# Altium PCB pcb.PcbDoc
Units mm, origin at the board's own origin, x right, y up, seen from the top; angles counter-clockwise.
Board outline 94.24 x 98.55 mm, 2 copper layers (Top Layer, Bottom Layer); 25 components, 45 nets, 174 pads, 88 vias.
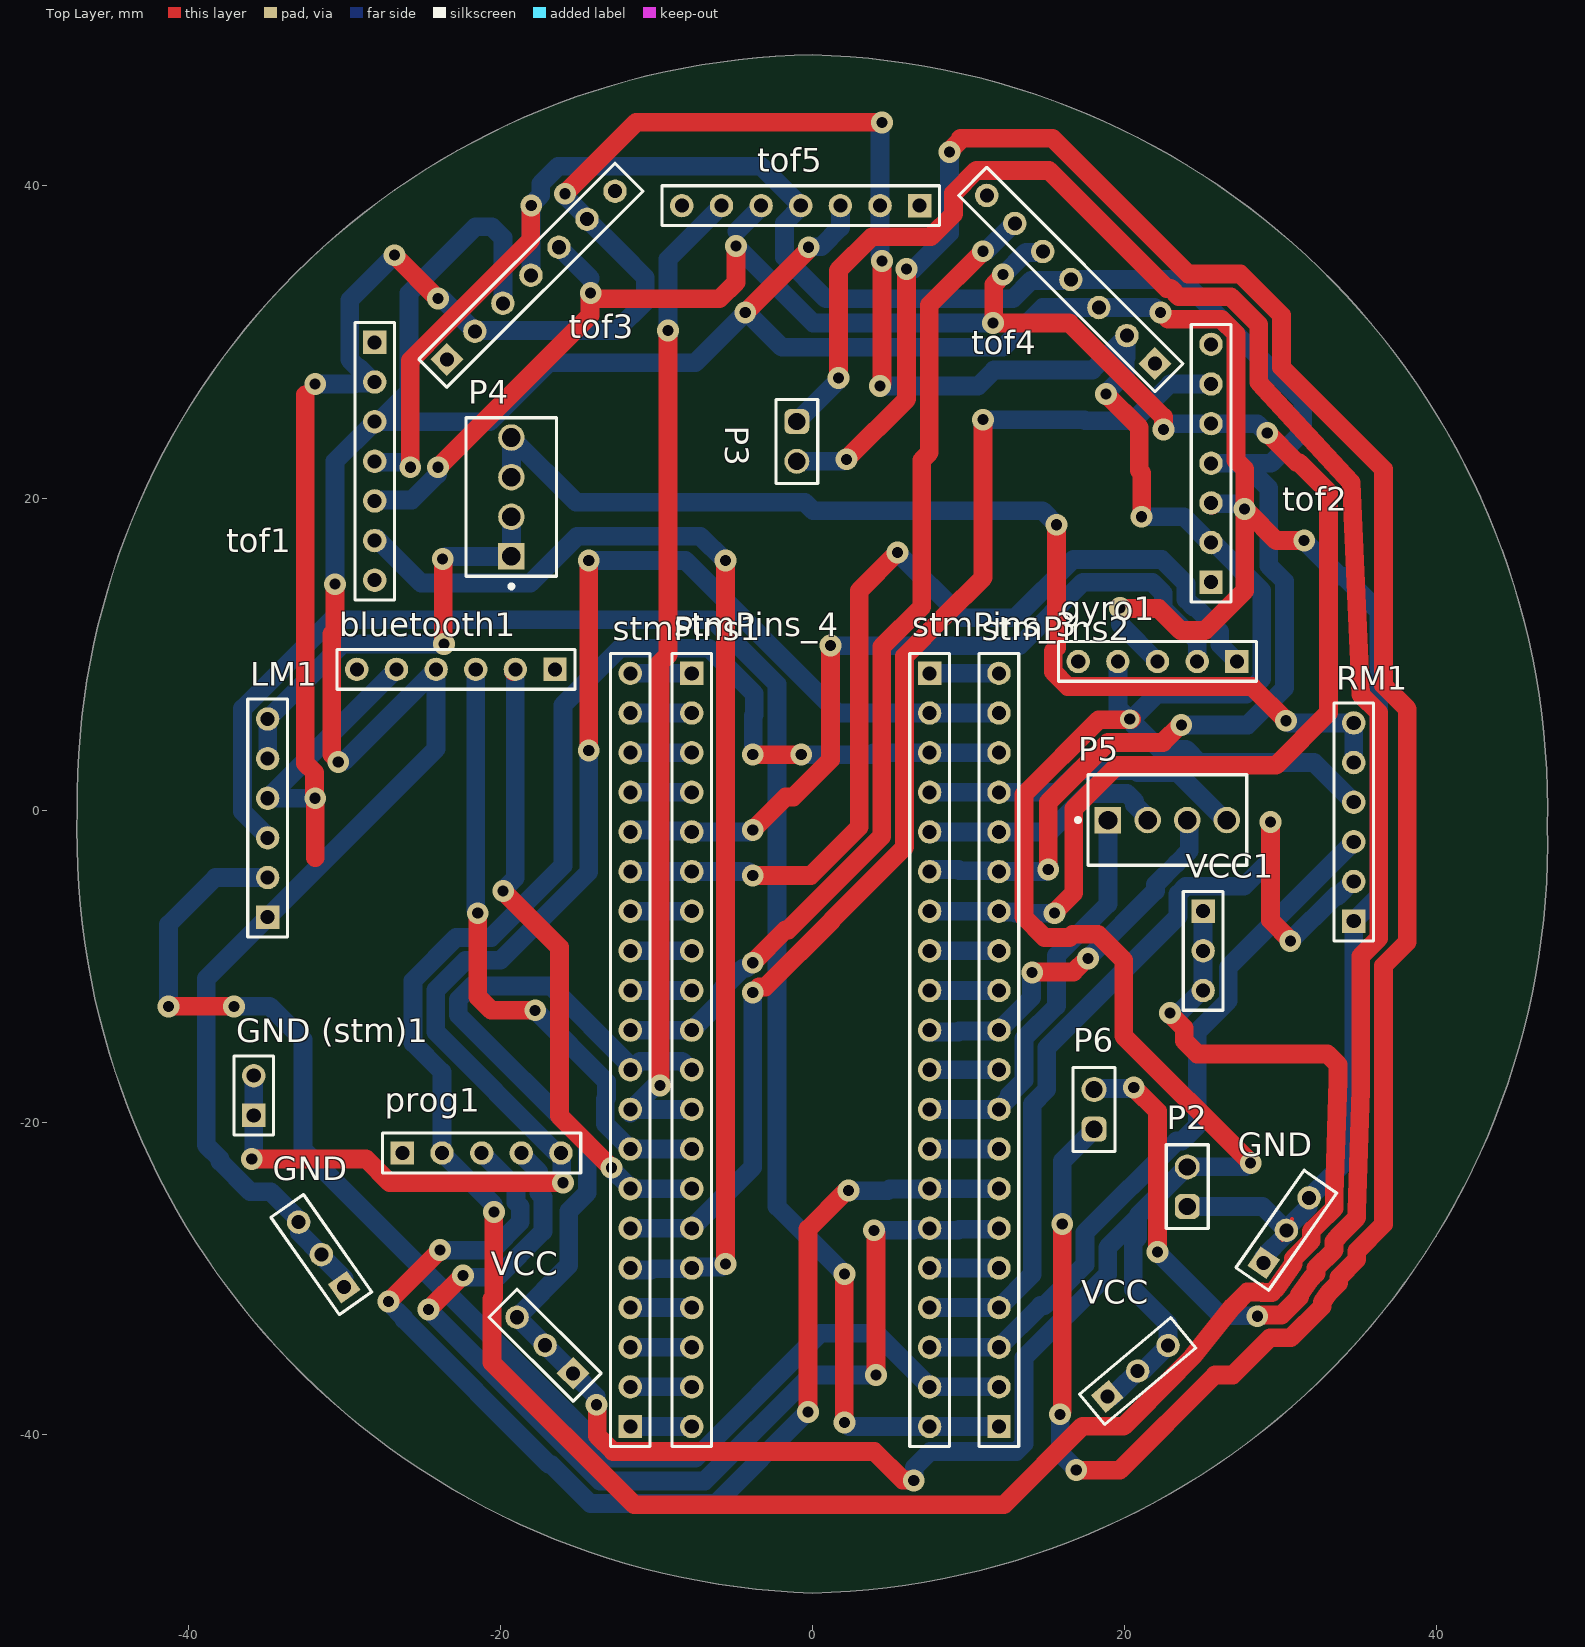
[diagram p0: Top Layer view]
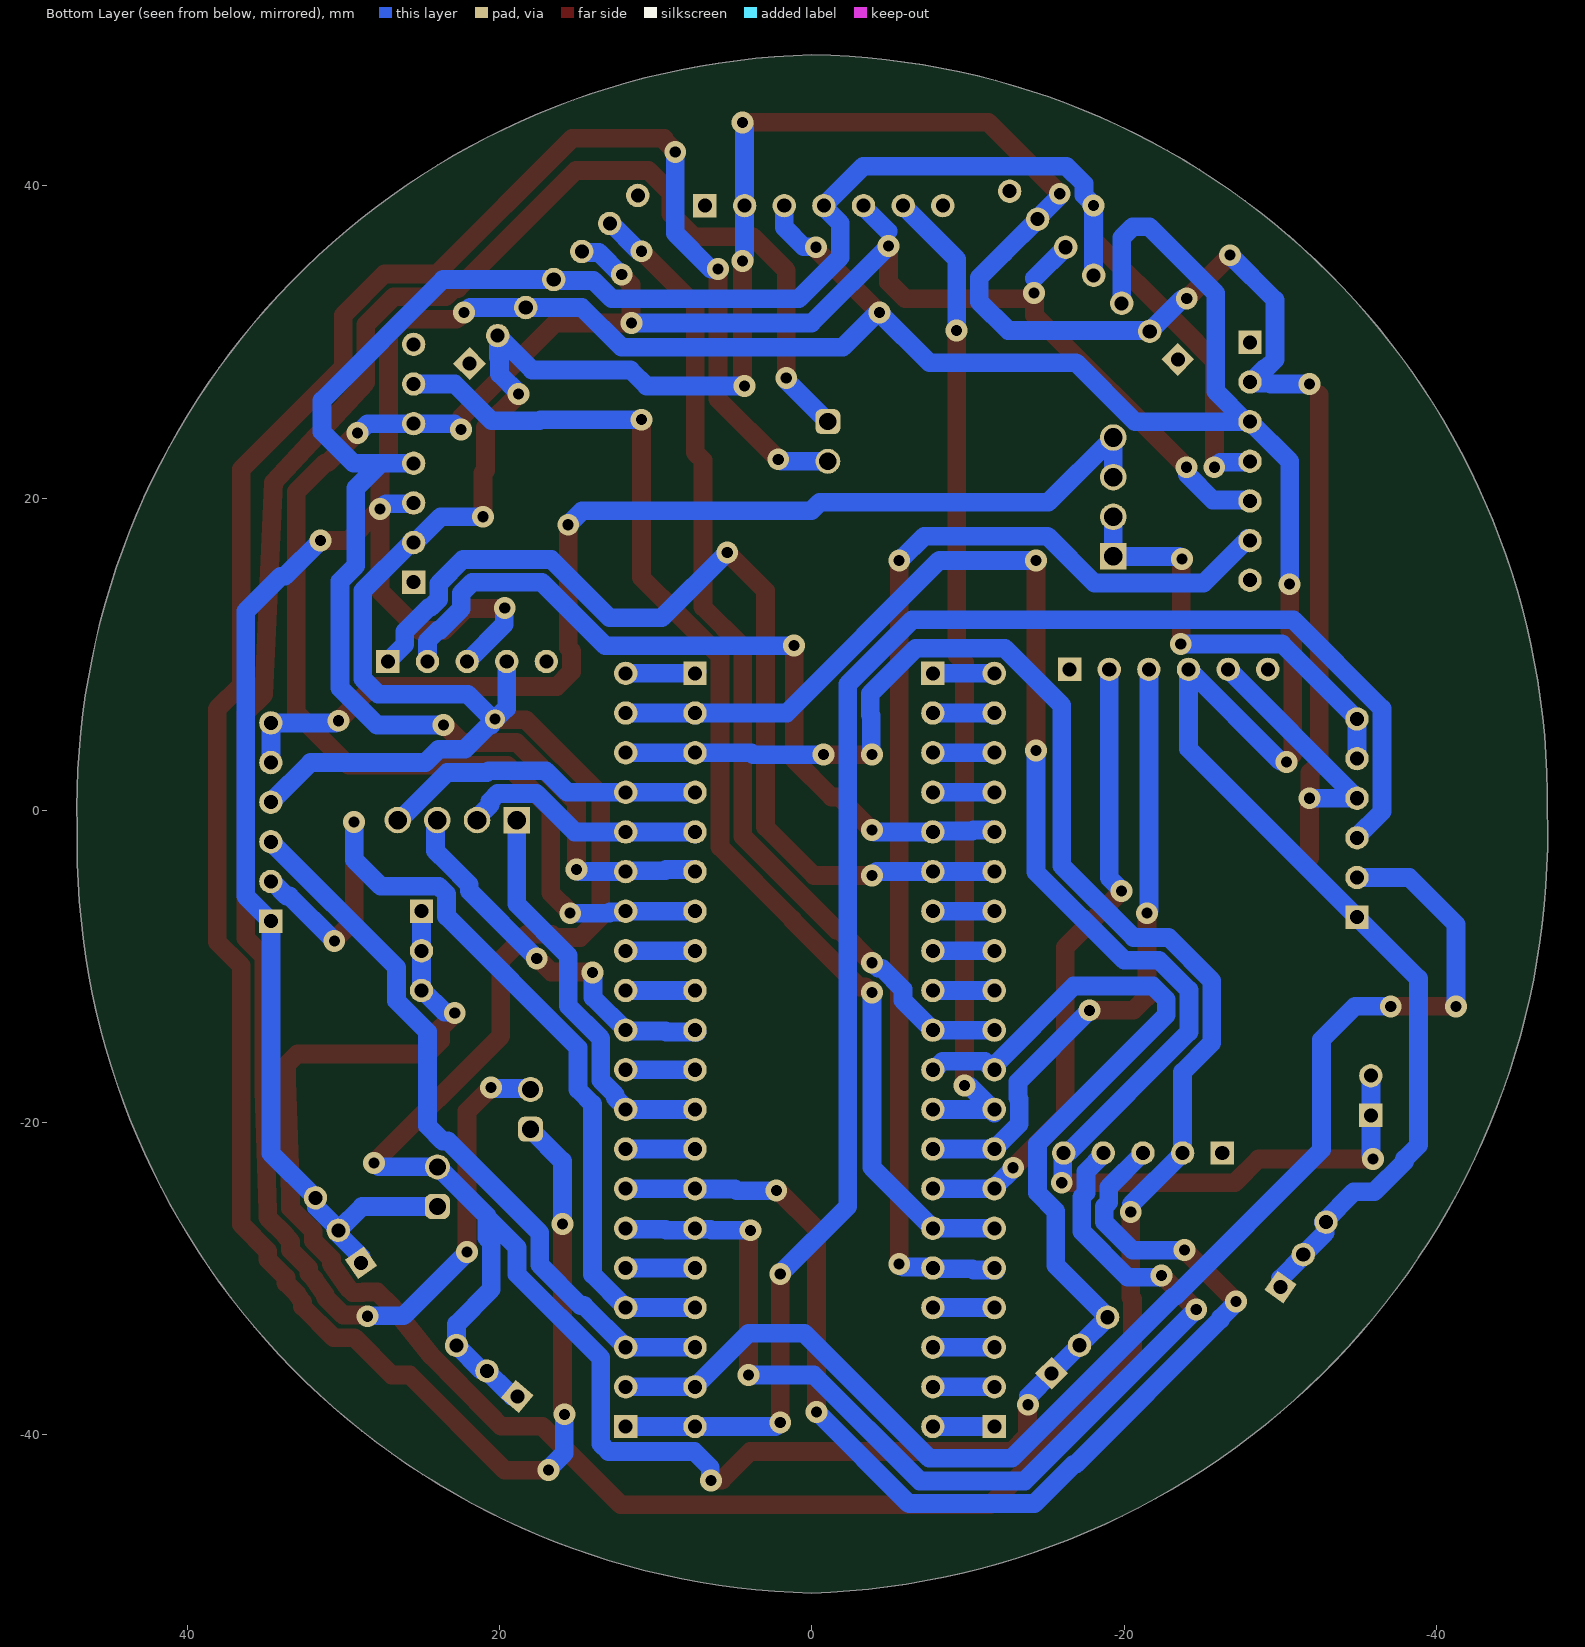
[diagram p1: Bottom Layer view, seen from below]

## Layer stack, top to bottom
Top Solder: solder mask 0.0102, Solder Resist, Dk 3.5
Top Layer: signal copper 0.0356
Dielectric 1: dielectric 0.32, FR-4, Dk 4.8
Bottom Layer: signal copper 0.0356
Bottom Solder: solder mask 0.0102, Solder Resist, Dk 3.5

## Board outline
-47.117,0 ccw(c1.524,-1.524) 0,-50.165 ccw(c-1.026,-2.058) 47.082,-1.032 ccw(c-1.168,0.137) 0,48.387 ccw(c0.635,0.635)

## Design rules (kind name [scope] priority, off if disabled: settings)
Clearance [All] p1: gap=0.254 ignorepadtopadclearanceinfootprint=FALSE except(0: Arc-Hole Track-Hole SMDPad-Hole THPad-Hole Via-Hole Fill-Hole Poly-Hole Region-Hole Text-Hole)
PolygonConnect [All] p1: connectstyle=Relief reliefconductorwidth=0.254 reliefentries=4 polygonreliefangle="90 Angle" airgapwidth=0.254
RoutingVias [All] p1: holewidth=0.711 width=1.4 viastyle="Through Hole" minholewidth=0.711 minwidth=1.4 maxholewidth=0.711 maxwidth=1.4
SolderMaskExpansion [All] p1: expansion=0.102 istentingtop=FALSE
Width [All] p1: maxlimit=1.2 minlimit=0.2 preferedwidth=1.2 minimp=50.000000 maximp=50.000000 favimp=50.000000
30 further rules are at their usual default settings.

## Classes and differential pairs
component class Sheet1: bluetooth1 GND "GND (stm)1" gyro1 prog1 RM1 stm1 stmPins1 stmPins2 stmPins_3 stmPins_4 tof1 tof2 tof3 tof4 tof5 VCC1

## Components (designator, comment, footprint, x,y, rotation, side; value= is the part's Value field where it differs from the comment)
bluetooth1 "Header 6" HDR1X6 -16.51,9.017 r180 top
GND "Header 3" HDR1X3 28.896,-29.005 r55 top
GND "Header 3" HDR1X3 -30.023,-30.562 r125 top
"GND (stm)1" "Header 2" HDR1X2 -35.814,-19.558 r90 top
gyro1 "Header 5" HDR1X5 27.178,9.525 r180 top
LM1 "Header 6" HDR1X6 -34.925,-6.858 r90 top
P2 "61300211121" 61300211121 24.003,-24.13 r90 top
P3 "61300211121" 61300211121 -1.016,23.622 r270 top
P4 "22-27-2041" MOLX-22-27-2041_V -19.304,20.066 r270 top
P5 "22-27-2041" MOLX-22-27-2041_V 22.733,-0.635 r180 top
P6 "61300211121" 61300211121 18.034,-19.177 r90 top
prog1 "Header 5" HDR1X5 -26.289,-21.971 r0 top
RM1 "Header 6" HDR1X6 34.671,-7.112 r90 top
stmPins1 "Header 20" HDR1X20 -11.684,-39.497 r90 top
stmPins2 "Header 20" HDR1X20 11.938,-39.497 r90 top
stmPins_3 "Header 20" HDR1X20 7.493,8.763 r270 top
stmPins_4 "Header 20" HDR1X20 -7.747,8.763 r270 top
tof1 "Header 7" HDR1X7 -28.067,29.972 r270 top
tof2 "Header 7" HDR1X7 25.527,14.605 r90 top
tof3 "Header 7" HDR1X7 -23.44,28.884 r45 top
tof4 "Header 7" HDR1X7 21.934,28.612 r135 top
tof5 "Header 7" HDR1X7 6.858,38.735 r180 top
VCC "Header 3" HDR1X3 -15.349,-36.086 r135 top
VCC "Header 3" HDR1X3 18.882,-37.574 r40 top
VCC1 "Header 3" HDR1X3 25.019,-6.477 r270 top

## Footprints (in the part's own frame and the unit in brackets; to place one, negate y for a bottom-side part, rotate by r counter-clockwise, add the part's x,y. Pads: shape width x height; smd on the part's side, far side on the other; paste and mask are expansions set on the pad)
61300211121 [mm] "Pin Header, pitch 2.54 mm, THT, Vertical, single row, 2p"
  rrect50% 1.6x1.6 hole 1.1: 1(-1.27,0)
  round 1.6 hole 1.1: 2(1.27,0)
  silkscreen extent -2.69,-1.34 2.69,1.34, body extent -2.54,-1.27 2.54,1.27, height 8.57
HDR1X2 [mm] "Connector; Header; 2 Position"
  rect 1.5x1.5 hole 0.9: 1(0,0)
  round 1.5 hole 0.9: 2(2.54,0)
  silkscreen extent -1.27,-1.27 3.81,1.27
HDR1X3 [mm] "Connector; Header; 3 Position"
  rect 1.5x1.5 hole 0.9: 1(0,0)
  round 1.5 hole 0.9: 2(2.54,0) 3(5.08,0)
  silkscreen extent -1.27,-1.27 6.35,1.27
HDR1X5 [mm] "Connector; Header; 5 Position"
  rect 1.5x1.5 hole 0.9: 1(0,0)
  round 1.5 hole 0.9: 2(2.54,0) 3(5.08,0) 4(7.62,0) 5(10.16,0)
  silkscreen extent -1.27,-1.27 11.43,1.27
HDR1X6 [mm] "Connector; Header; 6 Position"
  rect 1.5x1.5 hole 0.9: 1(0,0)
  round 1.5 hole 0.9: 2(2.54,0) 3(5.08,0) 4(7.62,0) 5(10.16,0) 6(12.7,0)
  silkscreen extent -1.27,-1.27 13.97,1.27
HDR1X7 [mm] "Connector; Header; 7 Position"
  rect 1.5x1.5 hole 0.9: 1(0,0)
  round 1.5 hole 0.9: 2(2.54,0) 3(5.08,0) 4(7.62,0) 5(10.16,0) 6(12.7,0) 7(15.24,0)
  silkscreen extent -1.27,-1.27 16.51,1.27
HDR1X20 [mm] "Connector; Header; 20 Position"
  rect 1.5x1.5 hole 0.9: 1(0,0)
  round 1.5 hole 0.9: 2(2.54,0) 3(5.08,0) 4(7.62,0) 5(10.16,0) 6(12.7,0) 7(15.24,0) 8(17.78,0) 9(20.32,0) 10(22.86,0) 11(25.4,0) 12(27.94,0) 13(30.48,0) 14(33.02,0) 15(35.56,0) 16(38.1,0) 17(40.64,0) 18(43.18,0) 19(45.72,0) 20(48.26,0)
  silkscreen extent -1.27,-1.27 49.53,1.27
MOLX-22-27-2041_V [mm] "CONN, 4-Leads, Body 10.16x5.8mm, Pitch 2.54mm"
  rect 1.7x1.7 hole 1.19: 1(3.81,0)
  round 1.7 hole 1.19: 2(1.27,0) 3(-1.27,0) 4(-3.81,0)
  silkscreen extent -5.08,-2.9 5.85,2.9, body extent -5.08,-2.9 5.08,2.9, height 11.7

## Part data
bluetooth1 LM1 RM1: "Header, 6-Pin", LatestRevisionDate=17-Jul-2002, LatestRevisionNote="Re-released for DXP Platform.", Publisher="Altium Limited"
GND GND VCC VCC VCC1: "Header, 3-Pin", LatestRevisionDate=17-Jul-2002, LatestRevisionNote="Re-released for DXP Platform.", Publisher="Altium Limited"
"GND (stm)1": "Header, 2-Pin", LatestRevisionDate=17-Jul-2002, LatestRevisionNote="Re-released for DXP Platform.", Publisher="Altium Limited"
gyro1 prog1: "Header, 5-Pin", LatestRevisionDate=17-Jul-2002, LatestRevisionNote="Re-released for DXP Platform.", Publisher="Altium Limited"
P2 P3 P6: library part CMP-1712-00002-5, Color=Black, Contact Resistance=20mΩ, Current Rating=3A, Max Operating Temperature=125°C, Min Operating Temperature=-40°C, Operating Supply Voltage=250V, Connector Type="Male Pin", Contact Gender=Male, Contact Material=Copper, Contact Mating Length=5.9944mm, Contact Plating=Gold, Gender=Male, Height=8.94mm, Housing Material=PBT, Lead Free="Lead Free", Lead Pitch=2.54mm, Mount="Through Hole", NexarPartId=20081794, Number of Contacts=2, Number of Pins=2, Number of Positions=2, Number of Rows=1, Orientation=Vertical, Packaging=Bulk, Pitch=2.54mm, REACH SVHC="No SVHC", RoHS=Compliant, Termination="Through Hole", Voltage Rating=250V
P4 P5: library part CMP-2000-05243-1, "Male Header, Pitch 2.54 mm, 1 x 4 Position, Height 11.7 mm, Tail Length 3.56 mm, RoHS, Bulk", Current Rating=4A, Manufacturer=Molex, Operating temperature=0degCto+75degC, Voltage Rating=250V, Contact Material=Tinplatedbrass, Datasheet URL=http://www.molex.com/pdm_docs/sd/022272041_sd.pdf, Datasheet Version="Rev. F, 06/2009", Housing Material=Nylon(UL94V-0), Manufacturer URL=http://www.molex.com/
stmPins1 stmPins2 stmPins_3 stmPins_4: "Header, 20-Pin", LatestRevisionDate=17-Jul-2002, LatestRevisionNote="Re-released for DXP Platform.", Publisher="Altium Limited"
tof1 tof2 tof3 tof4 tof5: "Header, 7-Pin", LatestRevisionDate=17-Jul-2002, LatestRevisionNote="Re-released for DXP Platform.", Publisher="Altium Limited"

## Via types
v1: diameter 1.4, hole 0.711, Top Layer to Bottom Layer, 87 vias
v2: diameter 1.27, hole 0.711, Top Layer to Bottom Layer, 1 vias

## Nets (pads, with @x,y where several pads share a name; then routed paths per layer and width w, separated by ;. In a path a pad name is that pad's centre, name@x,y a point inside that pad or via, vN(x,y) a via of type N, cw(c..) or ccw(c..) an arc to the next point about the centre after c; other vN are vias at no path point)
5V: bluetooth1.5 gyro1.4 LM1.4 P2.2 RM1.4 stmPins1.10 stmPins_4.11 tof1.2 tof2.2 tof3.2 tof3.6 tof4.2 tof5.2 VCC.1 VCC.2 VCC.3 | length 367.9
  Top Layer w0.254: stmPins1.10@-11.811,-16.51 stmPins1.10 ; VCC.1@18.882,-37.574 VCC.1@19.195,-37.574 ; VCC.2@20.828,-35.941 VCC.2@20.985,-35.941 ; VCC.3@22.617,-34.308 VCC.3@22.774,-34.308 ; P2.2@23.749,-22.606 P2.2
  Top Layer w1.2: -32.512,26.616 -32.512,3.009 -31.915,2.413 -31.915,0.854 -31.877,0.816 -31.877,-3.048 ; v1(-26.797,35.56) v1(-24.014,32.777) ; v1(-15.875,39.497) -11.303,44.069 v1(4.445,44.069) ; v1(-13.843,-38.1) -13.805,-38.138 -13.805,-40.084 -12.788,-41.101 3.948,-41.101 5.765,-42.918 6.439,-42.918 v1(6.477,-42.956) ; v1(4.318,27.178) 4.318,27.232 4.445,27.359 v1(4.445,35.179) ; v1(18.796,26.67) 18.796,26.651 20.925,24.522 20.925,21.765 21.082,21.608 v1(21.082,18.796) ; v2(20.32,5.827) 20.432,5.827 20.397,5.792 18.329,5.792 13.542,1.004 13.542,-6.85 14.85,-8.158 16.461,-8.158 16.667,-7.952 18.277,-7.952 19.939,-9.613 19.939,-14.478 v1(28.067,-22.606)
  Bottom Layer w1.2: v1(-31.877,0.762) LM1.4 -34.925,0.889 -34.896,0.86 -34.827,0.86 bluetooth1.5 ; v1(-31.877,27.305) -29.377,27.305 -29.307,27.375 tof1.2@-28.124,27.375 ; tof1.2 tof1.2@-28.124,27.375 ; v1(-26.797,35.56) -29.671,32.686 -29.671,28.868 -29.141,28.338 -29.054,28.338 -28.124,27.408 tof1.2@-28.124,27.375 ; v1(-24.014,32.777) -23.975,32.738 -23.703,32.738 tof3.2 -21.587,30.737 -12.572,30.737 -10.725,32.584 -10.725,34.129 -12.301,35.705 tof3.6 -14.46,37.945 -15.837,39.322 -15.837,39.459 v1(-15.875,39.497) ; v1(-13.843,-38.1) -13.881,-38.062 -13.881,-37.554 -15.349,-36.086 -17.145,-34.29 -18.941,-32.494 -15.621,-29.174 -15.621,-25.693 -14.448,-24.52 -14.448,-21.384 -22.705,-13.127 -22.705,-12.133 -21.845,-11.273 -16.776,-11.273 -11.741,-16.308 -11.741,-16.58 stmPins1.10 -11.603,-16.637 -11.065,-16.099 -8.366,-16.099 -7.828,-16.637 stmPins_4.11 ; v1(4.318,27.178) 10.6,27.178 11.626,28.204 17.934,28.204 tof4.2@20.081,30.35 ; v1(4.445,35.179) 4.445,35.233 4.318,35.36 tof5.2 4.318,43.888 4.445,44.015 v1(4.445,44.069) ; v1(6.477,-42.956) 6.515,-42.918 6.515,-42.126 7.54,-41.101 13.042,-41.101 13.542,-40.601 13.542,-35.099 18.9,-29.741 18.9,-28.021 20.828,-26.093 ; v1(18.796,26.67) 18.796,26.724 20.02,27.948 20.02,28.965 20.081,29.027 tof4.2@20.081,30.35 ; VCC.1@18.882,-37.574 19.183,-37.574 19.483,-37.273 19.496,-37.273 20.828,-35.941 20.885,-35.884 21.198,-35.884 22.774,-34.308 22.774,-32.934 20.544,-30.704 20.544,-27.677 20.828,-27.393 20.828,-26.002 23.97,-22.86 P2.2 27.759,-22.86 28.013,-22.606 v1(28.067,-22.606) ; gyro1.4 19.558,6.496 19.632,6.496 20.301,5.827 v2(20.32,5.827) v2@20.385,5.761 ; tof4.2 tof4.2@20.081,30.35 ; v2@20.574,5.461 v2@20.574,5.573 ; v1(21.082,18.796) 23.795,18.796 25.446,17.145 tof2.2 25.584,17.088 25.752,17.088 28.782,14.058 28.782,8.421 27.786,7.425 22.049,7.425 v2@20.385,5.761 ; RM1.4 32.131,3.048 24.786,3.048 23.927,3.907 22.24,3.907 v2@20.574,5.573 ; v2@20.385,5.761 v2@20.574,5.573
6V: P3.2 P6.1 | length 164.7
  Top Layer w1.2: v1(2.159,22.479) 6.019,26.339 v1(6.019,34.671) ; v1(8.763,42.164) 8.763,42.218 9.466,42.921 9.466,43.053 15.367,43.053 24.063,34.357 27.396,34.357 30.039,31.714 30.039,28.381 36.576,21.844 36.576,8.008 38.1,6.484 38.1,-8.447 36.576,-9.971 36.576,-26.543 34.865,-28.254 34.865,-28.793 33.703,-29.955 33.703,-30.294 33.031,-30.966 32.645,-31.517 32.645,-31.805 30.639,-33.811 29.308,-33.811 26.924,-36.195 25.781,-36.195 19.685,-42.291 v1(16.891,-42.291) ; v1(15.856,-38.716) 15.856,-38.662 15.992,-38.525 15.992,-26.553 16.002,-26.543 15.992,-26.533 v1(15.992,-26.53)
  Bottom Layer w1.2: P3.2 1.978,22.352 2.105,22.479 v1(2.159,22.479) ; v1(6.019,34.671) 6.477,34.671 8.763,36.957 v1(8.763,42.164) ; v1(15.856,-38.716) 15.87,-38.73 15.87,-41.216 16.891,-42.237 v1(16.891,-42.291) ; v1(15.992,-26.53) 15.992,-22.489 P6.1
GND: bluetooth1.4 GND.1 GND.2 GND.3 gyro1.3 LM1.1 P2.1 RM1.1 tof1.3 tof2.3 tof3.3 tof4.3 tof5.3 | length 272.6
  Top Layer w0.254: GND.1@28.896,-29.005 GND.1@28.896,-28.762 ; GND.2@30.115,-27.543 30.115,-27.162 30.353,-26.924 30.353,-26.587 30.708,-26.232 30.708,-26.188 ; GND.3@31.81,-25.086 GND.3@31.81,-24.843
  Top Layer w1.2: LM1.1@-34.925,-6.985 LM1.1 ; v1(-30.607,14.478) -30.607,11.492 -30.814,11.285 -30.814,3.563 -30.397,3.146 v1(-30.397,3.092) ; tof1.3@-28.067,24.765 tof1.3 ; v1(-4.318,31.877) -0.292,35.903 -0.292,36.03 v1(-0.254,36.068) ; v1(19.685,12.954) 19.723,12.916 22.177,12.916 23.588,11.505 25.135,11.505 27.686,14.056 27.686,19.177 27.679,19.184 v1(27.679,19.304) ; v1(22.29,31.876) 22.344,31.876 22.771,31.449 26.191,31.449 27.131,30.509 27.131,22.404 27.679,21.856 27.679,19.358 v1@27.706,19.331 ; tof2.3 25.527,19.558 tof2.3@25.573,19.558 ; v1@27.94,19.05 29.718,17.272 v1(31.496,17.272)
  Bottom Layer w1.2: v1(-30.607,14.478) -30.607,22.352 -28.13,24.828 -28.003,24.828 tof1.3 tof1.3@-27.813,24.892 ; v1(-30.397,3.092) -30.359,3.13 -30.017,3.13 bluetooth1.4 -24.13,3.937 LM1.1 -38.862,-10.795 -38.862,-21.463 -37.973,-22.352 -37.973,-22.518 -36.031,-24.459 -34.723,-24.459 -32.781,-26.401 -32.937,-26.401 -32.88,-26.458 -32.88,-27.082 -31.48,-28.482 -31.48,-28.563 -30.023,-30.02 GND.1@-30.023,-30.562 ; tof3.3 -19.848,36.68 -20.551,37.383 -21.605,37.383 -25.867,33.121 -25.867,26.838 tof1.3@-27.813,24.892 ; v1(-0.254,36.068) -0.216,36.106 0.546,36.106 1.778,37.338 tof5.3 ; v1(19.685,12.954) 19.723,12.916 19.723,11.9 gyro1.3 ; v1(22.29,31.876) 22.236,31.876 21.908,32.204 14.747,32.204 12.201,29.658 -1.972,29.658 -4.191,31.877 v1(-4.318,31.877) -7.528,28.667 -16.923,28.667 -20.698,24.892 tof1.3@-27.813,24.892 ; P2.1 28.829,-25.4 GND.2@30.353,-26.924 ; tof2.3@25.584,19.742 tof2.3 25.584,19.628 27.302,19.628 27.625,19.304 v1(27.679,19.304) ; GND.1@28.896,-29.005 28.896,-28.624 30.296,-27.225 30.296,-26.981 GND.2@30.353,-26.924 ; v1(31.496,17.272) 33.778,14.99 34.032,14.99 36.275,12.747 36.275,-5.508 RM1.1 34.671,-21.982 31.81,-24.843 31.752,-24.901 31.752,-25.443 30.353,-26.843 GND.2@30.353,-26.924
lm_in_01: P5.1 stmPins2.9 stmPins_3.12 | length 26.1
  Bottom Layer w1.2: stmPins_3.12 7.493,-19.304 7.62,-19.177 stmPins2.9 11.938,-19.096 12.61,-18.424 12.61,-18.234 13.542,-17.301 13.542,-14.628 15.621,-12.549 15.621,-9.321 18.923,-6.019 P5.1
lm_motor_out: LM1.5 LM1.6 P4.1 P4.2 | length 28.3
  Top Layer w1.2: v1(-23.708,16.102) -23.67,16.065 -23.67,10.684 v1(-23.633,10.647)
  Bottom Layer w1.2: LM1.5 LM1.6 -30.12,10.647 v1(-23.633,10.647) ; v1(-23.708,16.102) -23.653,16.102 -23.499,16.256 P4.1 P4.2
lm_pwm: P5.2 stmPins2.16 stmPins_3.5 | length 16.1
  Bottom Layer w1.2: stmPins_3.5 7.493,-1.524 7.62,-1.397 stmPins2.16 15.2,-1.397 17.666,1.069 20.127,1.069 20.627,0.569 20.627,0.336 21.463,-0.5 P5.2
Netbluetooth1_2: bluetooth1.2 stmPins1.7 stmPins_4.14 | length 41.1
  Top Layer w1.2: v1(-19.831,-5.188) -16.226,-8.793 -16.226,-19.585 v1(-12.894,-22.917) ; bluetooth1.2@-19.177,8.89 bluetooth1.2
  Bottom Layer w1.2: v1(-19.831,-5.188) -19.831,-5.134 -19.05,-4.352 bluetooth1.2 ; v1(-12.894,-22.917) -12.894,-22.971 -11.684,-24.181 stmPins1.7 stmPins_4.14
Netbluetooth1_3: bluetooth1.3 stmPins1.8 stmPins_4.13 | length 40.6
  Top Layer w1.2: v1(-21.463,-6.604) -21.463,-11.968 -20.604,-12.827 v1(-17.78,-12.827) ; stmPins1.8 stmPins1.8@-11.684,-21.636
  Bottom Layer w1.2: bluetooth1.3 -21.59,-6.423 -21.463,-6.55 v1(-21.463,-6.604) ; v1(-17.78,-12.827) -13.208,-17.399 -13.208,-18.433 -13.288,-18.513 -13.288,-20.113 stmPins1.8 stmPins_4.13
"NetGND (stm)1_1": "GND (stm)1.1" "GND (stm)1.2" prog1.5 stmPins2.19 stmPins_3.2 | length 105.4
  Top Layer w1.2: v1(-35.941,-22.352) -28.616,-22.352 -27.092,-23.876 v1(-16.002,-23.876) ; v1(-14.351,3.81) v1(-14.351,16.002)
  Bottom Layer w1.2: v1(-35.941,-22.352) -35.941,-22.298 -35.814,-22.171 -35.814,-19.558 -35.814,-17.145 -35.687,-17.018 -35.814,-17.018 ; v1(-16.002,-23.876) -16.002,-23.822 -16.072,-23.752 -16.072,-22.028 -16.186,-21.914 -16.458,-21.914 -24.159,-14.213 -24.159,-11.531 -22.24,-9.612 -20.002,-9.612 -14.351,-3.961 v1(-14.351,3.81) ; v1(-14.351,16.002) -8.166,16.002 1.613,6.223 stmPins_3.2 7.493,6.096 7.62,6.223 stmPins2.19
Netgyro1_1: gyro1.1 stmPins1.15 stmPins_4.6 | length 63.5
  Top Layer w1.2: v1(-3.84,-4.191) -0.127,-4.191 2.981,-1.083 2.981,5.461 2.981,14.06 v1(5.431,16.51)
  Bottom Layer w1.2: stmPins1.15 -4.148,-3.937 -3.894,-4.191 v1(-3.84,-4.191) ; v1(5.431,16.51) 9.622,12.319 12.974,12.319 16.714,16.059 22.368,16.059 23.923,14.504 23.923,13.501 24.423,13.001 24.537,13.001 26.092,11.446 26.092,10.611 gyro1.1
Netgyro1_2: gyro1.2 stmPins1.16 stmPins_4.5 | length 50.8
  Top Layer w1.2: v1(-3.84,-1.27) -1.73,0.84 -1.25,0.84 1.143,3.233 v1(1.143,10.541)
  Bottom Layer w1.2: stmPins1.16 -11.557,-1.27 -10.355,-1.27 -10.286,-1.34 -7.804,-1.34 stmPins_4.5 -4.021,-1.397 -3.894,-1.27 v1(-3.84,-1.27) ; v1(1.143,10.541) 13.253,10.541 17.317,14.605 21.766,14.605 22.469,13.902 22.469,12.899 23.821,11.547 23.935,11.547 24.638,10.844 gyro1.2
NetLM1_2: LM1.2 stmPins2.2 stmPins_3.19 | length 86.9
  Top Layer w1.2: v1(-41.275,-12.573) v1(-37.084,-12.573)
  Bottom Layer w1.2: v1(-41.275,-12.573) -41.275,-7.327 -38.266,-4.318 LM1.2 ; v1(-37.084,-12.573) -34.798,-12.573 -32.652,-14.719 -32.652,-21.767 -23.234,-31.185 -23.147,-31.185 -12.803,-41.529 -7.511,-41.529 0.49,-33.528 4.064,-33.528 stmPins_3.19 stmPins2.2
NetLM1_3: LM1.3 stmPins2.1 stmPins_3.20 | length 106.5
  Top Layer w1.2: v1(2.032,-39.243) v1(2.032,-29.718)
  Bottom Layer w1.2: LM1.3 -34.844,-1.778 -36.529,-0.093 -36.529,6.506 -30.834,12.201 -6.421,12.201 -2.286,8.066 -2.286,-25.4 v1(2.032,-29.718) ; v1(2.032,-39.243) 2.086,-39.243 2.34,-39.497 stmPins_3.20 stmPins2.1
NetP3_1: P3.1 P6.2 | length 137.5
  Top Layer w1.2: v1(1.651,27.686) 1.651,34.583 3.801,36.733 7.564,36.733 9.029,38.198 9.029,39.527 10.494,40.992 15.12,40.992 22.682,33.43 22.934,33.43 23.461,32.903 26.794,32.903 28.585,31.112 28.585,27.411 34.504,20.995 35.122,7.405 36.275,6.252 36.275,-8.216 35.122,-9.369 35.122,-17.92 34.868,-25.687 34.868,-26.11 33.762,-27.215 33.411,-27.652 33.411,-28.191 32.249,-29.353 32.249,-29.692 31.913,-30.028 31.191,-31.059 31.191,-31.203 30.036,-32.357 28.706,-32.357 v1(28.492,-32.429) ; v1(20.574,-17.78) 22.098,-19.304 v1(22.098,-28.321)
  Bottom Layer w1.2: P3.1@-1.016,24.765 P3.1 1.613,27.521 1.613,27.648 v1(1.651,27.686) ; P6.2 18.111,-17.83 20.469,-17.83 20.52,-17.78 v1(20.574,-17.78) ; v1(22.098,-28.321) 26.168,-32.391 28.454,-32.391 v1(28.492,-32.429)
Netprog1_2: prog1.2 stmPins2.18 stmPins_3.3 VCC1.1 VCC1.2 VCC1.3 | length 180.8
  Top Layer w1.2: v1(-20.427,-25.759) -20.427,-31.227 -20.545,-31.345 -20.545,-35.4 -11.435,-44.51 12.259,-44.51 17.285,-39.484 19.924,-39.484 20.627,-38.781 24.378,-34.973 26.938,-31.785 27.848,-30.875 28.771,-30.875 28.811,-30.903 29.434,-30.903 29.737,-30.6 30.795,-29.09 30.795,-28.751 31.957,-27.588 31.957,-26.965 32.308,-26.613 33.414,-25.508 33.414,-24.637 33.668,-17.318 33.668,-16.324 32.965,-15.621 24.652,-15.621 23.803,-14.772 23.803,-13.966 22.89,-13.053 v1(22.89,-12.999) ; v1(-3.84,3.556) v1(-0.732,3.556)
  Bottom Layer w1.2: v1(-20.427,-25.759) -20.466,-25.721 -20.466,-25.254 prog1.2 -23.749,-16.78 -25.613,-14.917 -25.613,-10.928 -22.842,-8.158 -20.604,-8.158 -16.002,-3.556 -16.002,6.713 -12.348,10.367 -6.643,10.367 -3.74,7.464 -3.74,6.11 -3.802,6.048 -3.802,3.594 v1(-3.84,3.556) ; v1(-0.732,3.556) 3.765,3.556 3.892,3.683 stmPins_3.3 7.493,3.556 7.62,3.683 stmPins2.18 ; v1(22.89,-12.999) 22.928,-12.96 23.535,-12.96 24.938,-11.557 VCC1.3 VCC1.2 VCC1.1
Netprog1_3: prog1.3 stmPins2.7 stmPins_3.14 | length 76
  Top Layer w1.2: v1(-27.178,-31.496) v1(-23.876,-28.194) ; v1(-0.295,-38.567) -0.295,-26.838 2.159,-24.384 v1(2.286,-24.384)
  Bottom Layer w1.2: v1(-27.178,-31.496) -27.178,-31.55 -26.179,-32.549 -26.179,-32.635 -16.905,-41.909 -16.763,-41.909 -14.236,-44.437 -6.21,-44.437 -0.34,-38.567 v1(-0.295,-38.567) ; v1(-23.876,-28.194) -20.535,-28.194 -18.734,-26.392 -18.734,-25.398 -19.01,-25.122 -19.01,-24.17 prog1.3 ; v1(2.286,-24.384) 4.832,-24.384 4.943,-24.273 7.477,-24.273 stmPins_3.14 7.493,-24.384 7.62,-24.257 stmPins2.7
Netprog1_4: prog1.4 stmPins2.6 stmPins_3.15 | length 68.6
  Top Layer w1.2: v1(-24.625,-31.991) -24.595,-31.991 -22.427,-29.824 v1(-22.397,-29.824) ; v1(3.937,-26.924) 3.937,-26.978 4.064,-27.105 v1(4.064,-36.195)
  Bottom Layer w1.2: v1(-24.625,-31.991) -13.633,-42.983 -6.908,-42.983 -0.12,-36.195 v1(4.064,-36.195) ; v1(-22.397,-29.824) -22.343,-29.824 -22.233,-29.934 -20.219,-29.934 -17.28,-26.995 -17.28,-24.796 -17.556,-24.52 -17.556,-23.165 -18.669,-22.052 prog1.4 ; v1(3.937,-26.924) 6.437,-26.924 6.507,-26.854 7.436,-26.854 stmPins_3.15 7.62,-26.924 9.33,-26.924 9.399,-26.854 11.881,-26.854 stmPins2.6
NetRM1_2: RM1.2 stmPins2.4 stmPins_3.17 | length 58.7
  Top Layer w1.2: v1(29.337,-0.762) 29.337,-7.058 30.607,-8.328 v1(30.607,-8.382)
  Bottom Layer w1.2: stmPins_3.17 stmPins2.4 14.064,-29.751 14.064,-18.836 14.996,-17.904 14.996,-15.23 23.415,-6.811 23.415,-5.373 23.915,-4.873 27.639,-4.873 29.337,-3.175 v1(29.337,-0.762) ; v1(30.607,-8.382) 33.481,-5.508 33.654,-5.508 34.59,-4.572 RM1.2
NetRM1_3: RM1.3 stmPins2.3 stmPins_3.18 | length 46.8
  Bottom Layer w1.2: stmPins_3.18 7.493,-34.29 7.62,-34.417 stmPins2.3 14.606,-31.749 14.835,-31.749 17.446,-29.139 17.446,-27.078 23.318,-21.206 23.658,-21.206 24.638,-20.226 24.638,-14.206 26.623,-12.221 26.623,-10.08 RM1.3
NetstmPins1_1: stmPins1.1 stmPins_4.20 | length 3.9
  Bottom Layer w1.2: stmPins1.1 stmPins_4.20
NetstmPins1_2: stmPins1.2 stmPins_4.19 | length 3.9
  Bottom Layer w1.2: stmPins1.2 stmPins_4.19
NetstmPins1_3: stmPins1.3 stmPins_4.18 | length 3.9
  Bottom Layer w1.2: stmPins1.3 stmPins_4.18
NetstmPins1_4: stmPins1.4 stmPins_4.17 | length 3.9
  Bottom Layer w1.2: stmPins1.4 stmPins_4.17
NetstmPins1_5: stmPins1.5 stmPins_4.16 tof1.6 | length 77.2
  Top Layer w1.2: v1(-5.588,-29.083) v1(-5.588,16.002)
  Bottom Layer w1.2: tof1.6 -27.94,17.399 -25.089,14.548 -18.104,14.548 -15.096,17.556 -7.196,17.556 -5.642,16.002 v1(-5.588,16.002) ; stmPins1.5 -11.811,-29.464 -10.355,-29.464 -10.286,-29.394 -7.804,-29.394 -7.69,-29.28 -5.839,-29.28 -5.642,-29.083 v1(-5.588,-29.083)
NetstmPins1_6: stmPins1.6 stmPins_4.15 tof2.6 | length 79.4
  Top Layer w1.2: v1(-3.84,-11.684) -3.786,-11.684 -3.435,-11.333 -3.039,-11.333 1.249,-7.045 1.249,-7.006 5.889,-2.366 5.889,4.256 5.889,9.867 8.439,12.417 10.922,14.9 v1(10.922,25.019)
  Bottom Layer w1.2: stmPins1.6 stmPins_4.15 -3.84,-22.89 v1(-3.84,-11.684) ; v1(10.922,25.019) 17.399,25.019 17.473,24.945 20.536,24.945 22.896,27.305 tof2.6
NetstmPins1_9: stmPins1.9 stmPins_4.12 tof5.6 | length 64.9
  Top Layer w1.2: v1(-9.779,-17.653) -9.779,9.439 -9.271,9.947 v1(-9.271,30.734)
  Bottom Layer w1.2: v1(-9.779,-17.653) -9.817,-17.691 -10.117,-17.691 -11.603,-19.177 stmPins1.9 -11.684,-19.431 -11.43,-19.177 stmPins_4.12 ; v1(-9.271,30.734) -9.271,35.306 -5.94,38.637 -5.871,38.637 -5.842,38.608 tof5.6
NetstmPins1_11: stmPins1.11 stmPins_4.10 tof4.6 | length 64.6
  Top Layer w1.2: v1(-3.84,-9.779) -1.739,-7.678 -1.557,-7.678 4.435,-1.685 4.435,4.858 4.435,10.469 6.985,13.019 6.985,22.421 7.473,22.909 7.473,32.365 v1(10.922,35.814)
  Bottom Layer w1.2: stmPins1.11 stmPins_4.10 -5.827,-12.177 -5.827,-11.473 -4.484,-10.13 -4.245,-10.13 -3.894,-9.779 v1(-3.84,-9.779) ; v1(10.922,35.814) 10.96,35.852 11.133,35.852 12.873,37.592 tof4.6
NetstmPins1_12: stmPins1.12 stmPins_4.9 | length 4
  Bottom Layer w1.2: stmPins1.12 -11.557,-11.43 -11.43,-11.557 stmPins_4.9
NetstmPins1_13: stmPins1.13 stmPins_4.8 | length 3.9
  Bottom Layer w1.2: stmPins1.13 stmPins_4.8
NetstmPins1_14: stmPins1.14 stmPins_4.7 | length 4
  Bottom Layer w1.2: stmPins1.14 -11.684,-6.413 -11.62,-6.477 stmPins_4.7
NetstmPins1_17: stmPins1.17 stmPins_4.4 | length 4.1
  Bottom Layer w1.2: stmPins1.17 -11.684,1.27 -11.557,1.143 stmPins_4.4
NetstmPins1_18: stmPins1.18 stmPins_4.3 | length 3.9
  Bottom Layer w1.2: stmPins1.18 stmPins_4.3
NetstmPins1_19: stmPins1.19 stmPins_4.2 | length 4.1
  Bottom Layer w1.2: stmPins1.19 -11.684,6.096 -11.557,6.223 stmPins_4.2
NetstmPins1_20: stmPins1.20 stmPins_4.1 | length 3.9
  Bottom Layer w1.2: stmPins1.20 stmPins_4.1
NetstmPins2_5: stmPins2.5 stmPins_3.16 | length 4.4
  Bottom Layer w1.2: stmPins_3.16 stmPins2.5
NetstmPins2_8: stmPins2.8 stmPins_3.13 | length 4.4
  Bottom Layer w1.2: stmPins_3.13 stmPins2.8
NetstmPins2_10: stmPins2.10 stmPins_3.11 | length 4.4
  Bottom Layer w1.2: stmPins_3.11 stmPins2.10
NetstmPins2_12: stmPins2.12 stmPins_3.9 | length 4.6
  Bottom Layer w1.2: stmPins_3.9 7.493,-11.684 7.62,-11.557 stmPins2.12
NetstmPins2_13: stmPins2.13 stmPins_3.8 | length 4.4
  Bottom Layer w1.2: stmPins_3.8 stmPins2.13
NetstmPins2_14: stmPins2.14 stmPins_3.7 tof1.5 tof2.5 tof3.5 tof4.5 tof5.5 | length 137.9
  Top Layer w1.2: v1(-24.003,21.971) -14.262,31.712 -14.262,33.109 v1(-14.224,33.147) -14.17,33.147 -13.789,32.766 -5.969,32.766 -4.909,33.826 v1(-4.909,36.151) ; v1(12.192,34.32) 12.192,34.266 11.595,33.669 11.595,31.304 11.557,31.266 v1(11.557,31.212) 16.452,31.212 22.479,25.185 v1(22.479,24.384) ; v1(15.494,-6.604) 15.494,-6.55 16.733,-5.311 16.733,0.083 19.534,2.884 29.696,2.884 33.05,6.238 33.05,20.393 31.178,22.264 31.037,22.264 v1(29.127,24.174)
  Bottom Layer w1.2: tof1.5 -28.01,19.869 -25.685,19.869 -24.041,21.513 -24.041,21.933 v1(-24.003,21.971) ; tof3.5 -14.262,34.074 ; v1(-4.909,36.151) 0.03,31.212 v1(11.557,31.212) ; -4.871,37.085 -3.302,38.654 tof5.5 ; stmPins_3.7 stmPins2.14 11.995,-6.534 12.924,-6.534 12.994,-6.604 v1(15.494,-6.604) ; v1(12.192,34.32) 12.246,34.32 13.665,35.739 14.693,35.739 tof4.5 ; v1(22.479,24.384) 22.533,24.384 22.914,24.765 28.482,24.765 29.073,24.174 v1(29.127,24.174)
NetstmPins2_15: stmPins2.15 stmPins_3.6 tof1.4 tof2.4 tof3.4 tof4.4 tof5.4 | length 143.1
  Top Layer w1.2: tof1.4@-28.067,22.225 tof1.4 ; v1(-25.781,21.971) -25.787,21.977 -25.787,28.805 -23.557,31.035 -18.072,36.52 -18.072,38.697 v1(-18.034,38.735) ; v1(15.096,-3.81) 15.096,0.502 18.932,4.338 22.444,4.338 23.568,5.461 v1(23.622,5.461) ; tof4.4 tof4.4@16.637,33.909
  Bottom Layer w1.2: tof1.4 -28.01,22.295 -26.159,22.295 -25.835,21.971 v1(-25.781,21.971) ; tof3.4 -18.043,34.281 -18.043,38.726 v1(-18.034,38.735) -18.034,38.789 -17.429,39.394 -17.429,40.141 -16.306,41.264 -3.291,41.264 tof5.4 -0.762,38.654 -1.808,37.608 -1.808,35.424 0.85,32.766 12.836,32.766 14.012,33.942 16.489,33.942 tof4.4 23.641,34 31.399,26.241 31.399,24.248 29.376,22.225 27.701,22.225 tof2.4 ; stmPins_3.6 7.62,-3.81 9.33,-3.81 9.399,-3.88 11.881,-3.88 stmPins2.15 14.915,-3.937 15.042,-3.81 v1(15.096,-3.81) ; v1(23.622,5.461) 27.878,5.461 30.236,7.819 30.236,14.66 29.233,15.663 29.233,20.636 27.701,22.168
NetstmPins2_20: stmPins2.20 stmPins_3.1 | length 4.6
  Bottom Layer w1.2: stmPins_3.1@7.366,8.89 stmPins_3.1 stmPins2.20
rm_in_01: P5.3 stmPins2.11 stmPins_3.10 | length 24.9
  Top Layer w1.2: v1(14.067,-10.414) 14.105,-10.376 16.709,-10.376 17.58,-9.506 v1(17.634,-9.506)
  Bottom Layer w1.2: stmPins_3.10 7.366,-14.224 9.33,-14.224 9.399,-14.154 11.881,-14.154 14.029,-12.006 14.029,-10.452 v1(14.067,-10.414) ; v1(17.634,-9.506) 21.961,-5.178 21.961,-4.771 23.313,-3.419 24.13,-2.602 24.13,-0.889 24.003,-0.762 P5.3
rm_motor_out: P4.3 P4.4 RM1.5 RM1.6 | length 72.4
  Top Layer w1.2: v1(15.621,18.288) 15.621,10.396 15.414,10.189 15.414,8.861 16.354,7.921 28.147,7.921 v1(30.341,5.727)
  Bottom Layer w1.2: P4.3 -19.304,23.645 P4.4@-19.2,23.749 ; P4.4 -19.304,23.853 P4.4@-19.2,23.749 ; v1(15.621,18.288) 14.732,19.177 0.036,19.177 -0.506,19.72 -15.148,19.72 -19.177,23.749 P4.4@-19.2,23.749 ; v1(30.341,5.727) 30.395,5.727 30.534,5.588 RM1.6 RM1.5
rm_pwm: P5.4 stmPins2.17 stmPins_3.4 | length 21.2
  Top Layer w1.2: P5.4 P5.4@26.543,-0.508
  Bottom Layer w1.2: stmPins_3.4 15.684,1.143 17.064,2.523 20.729,2.523 20.839,2.413 23.365,2.413 26.54,-0.762 26.543,-0.762 P5.4
pads on no net: bluetooth1.1 bluetooth1.6 gyro1.5 prog1.1 tof1.1 tof1.7 tof2.1 tof2.7 tof3.1 tof3.7 tof4.1 tof4.7 tof5.1 tof5.7